# EAGLE board OLED-Sensor Link (EAGLE 9.6.1)
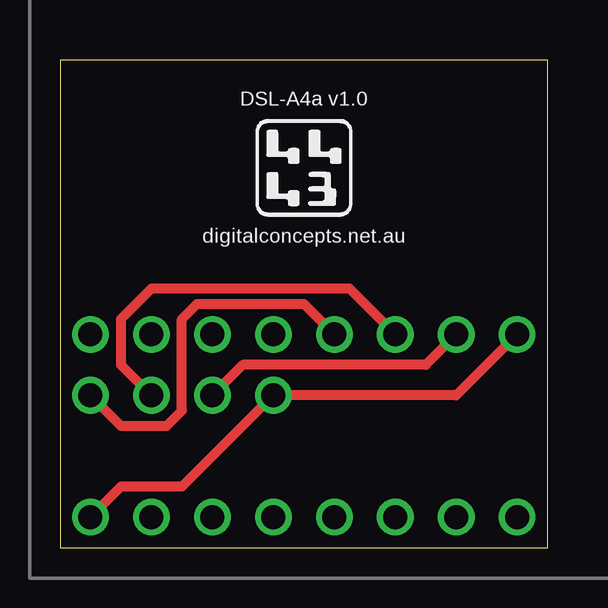
[diagram p0: board, top side]
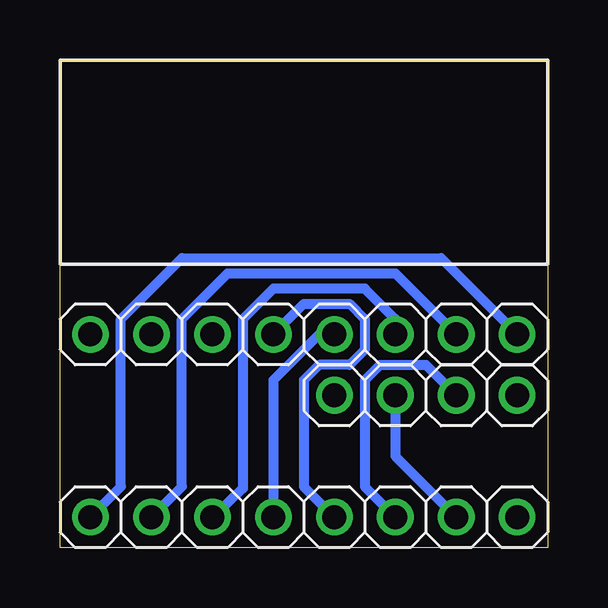
[diagram p1: board, bottom side, seen from below]

Size 20.32 x 20.32 mm. Coordinates in mm from the lower left corner, seen from the top.
Outline: 0,0 20.32,0 20.32,20.32 0,20.32 0,0
Copper layers (1*16): Top 0.035mm / dielectric 1.5mm / Bottom 0.035mm
Design rules "default *": minimum track width 6mil, minimum drill 0.35mm, track to track 6mil, track to pad 6mil, pad to pad 6mil, via to via 6mil, smd to smd 6mil, copper to edge 15mil, drill to drill 6mil, minimum pad ring 10mil, minimum via ring 8mil, stop-mask expansion 4mil, vias tented up to drill 0mil, thermal gap 10mil

## Footprints (pad centres in the part's own frame; a part is rotated, then mirrored left to right if it is on the bottom)
CONN_08-GENERIC = drill 1 pad 1.524: 1 0,0; 2 2.54,0; 3 5.08,0; 4 7.62,0; 5 10.16,0; 6 12.7,0; 7 15.24,0; 8 17.78,0
CONN_04-GENERIC = drill 1 pad 1.524: 1 0,0; 2 2.54,0; 3 5.08,0; 4 7.62,0

## Placement (x,y rotation side)
J1  BCS-A4a  [CONN_08-GENERIC]  19.05,1.27 0 bottom
J2  Sensor  [CONN_08-GENERIC]  19.05,8.89 0 bottom
J3  OLED Display  [CONN_04-GENERIC]  8.89,6.35 0 bottom

## Library data of the parts
J1-J3 = digitalconcepts

## Nets
N$1: J1.8 J2.1 J3.1
N$2: J1.7 J2.2 J3.2
N$3: J1.6 J2.3 J3.3
N$4: J1.5 J2.4 J3.4
N$5: J1.4 J2.5
N$6: J1.3 J2.6
N$7: J1.2 J2.7
N$8: J1.1 J2.8

## Tracks (layer width: path | path; a pad name or v marks a point on that pad's centre or on a via)
N$1
  Top 0.406: J2.1 16.51,6.35 J3.1 5.08,2.54 2.54,2.54 J1.8
N$2
  Top 0.406: J3.2 7.62,7.62 15.24,7.62 J2.2
  Bottom 0.406: J3.2 6.35,3.81 J1.7
N$3
  Top 0.406: J2.3 12.07,10.79 3.81,10.79 2.54,9.53 2.54,7.62 J3.3
  Bottom 0.406: J1.6 7.62,2.54 7.62,6.99 6.99,7.62 5.08,7.62 J3.3
N$4
  Top 0.406: J2.4 10.16,10.16 5.71,10.16 5.08,9.53 5.08,5.71 4.45,5.08 2.54,5.08 J3.4
  Bottom 0.406: J1.5 10.16,2.54 10.16,6.99 9.53,7.62 8.26,7.62 7.62,8.26 7.62,9.53 8.26,10.16 10.16,10.16 J2.4
N$5
  Bottom 0.406: J2.5 9.53,8.89 11.43,6.99 J1.4
N$6
  Bottom 0.406: J2.6 6.35,9.53 7.62,10.79 11.43,10.79 12.7,9.53 12.7,2.47 13.95,1.27 J1.3
N$7
  Bottom 0.406: J1.2 15.24,2.54 15.24,9.53 13.34,11.43 6.35,11.43 J2.7
N$8
  Bottom 0.406: J1.1 17.78,2.54 17.78,9.53 15.24,12.07 4.45,12.07 J2.8

## Text on the board
tPlace: DSL-A4a v1.0 | digitalconcepts.net.au